# Altium PCB PCB_X_buzzer.PcbDoc
Units mm, origin at the board's own origin, x right, y up, seen from the top; angles counter-clockwise.
Board outline 35.05 x 27.18 mm, 2 copper layers (Top Layer, Bottom Layer); 6 components, 11 nets, 38 pads, 9 vias.
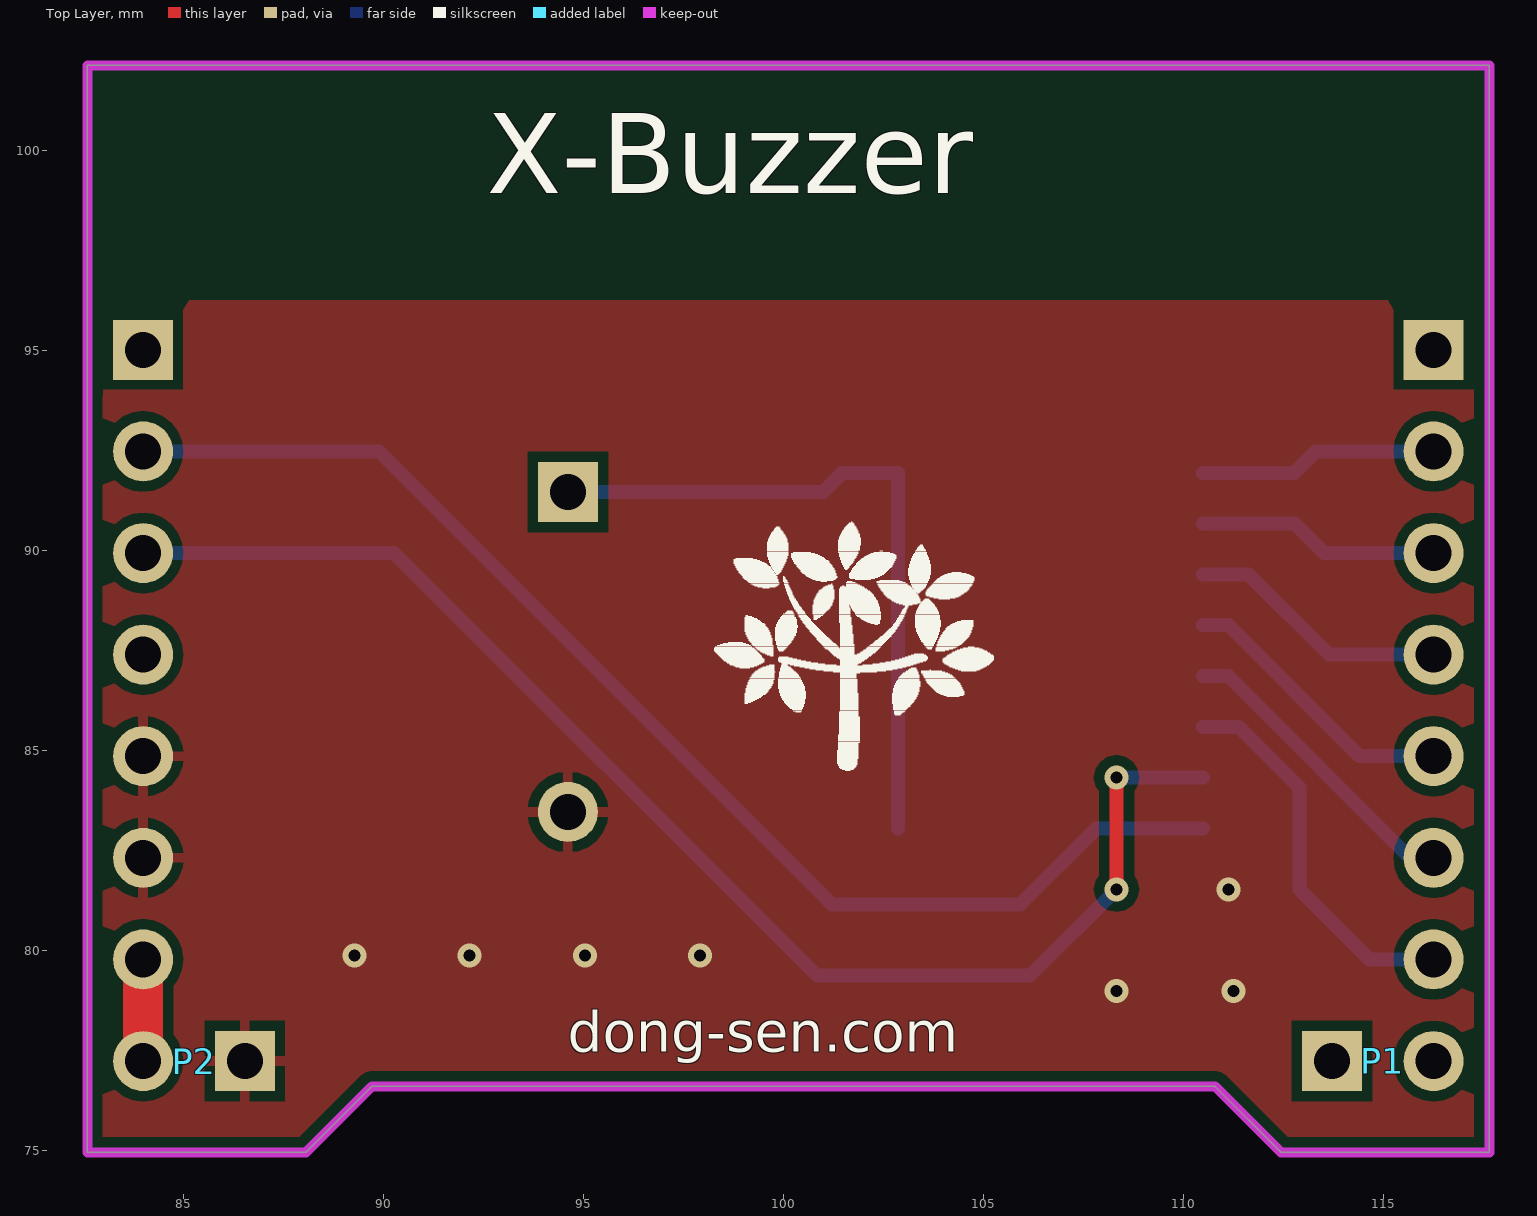
[diagram p0: Top Layer view]
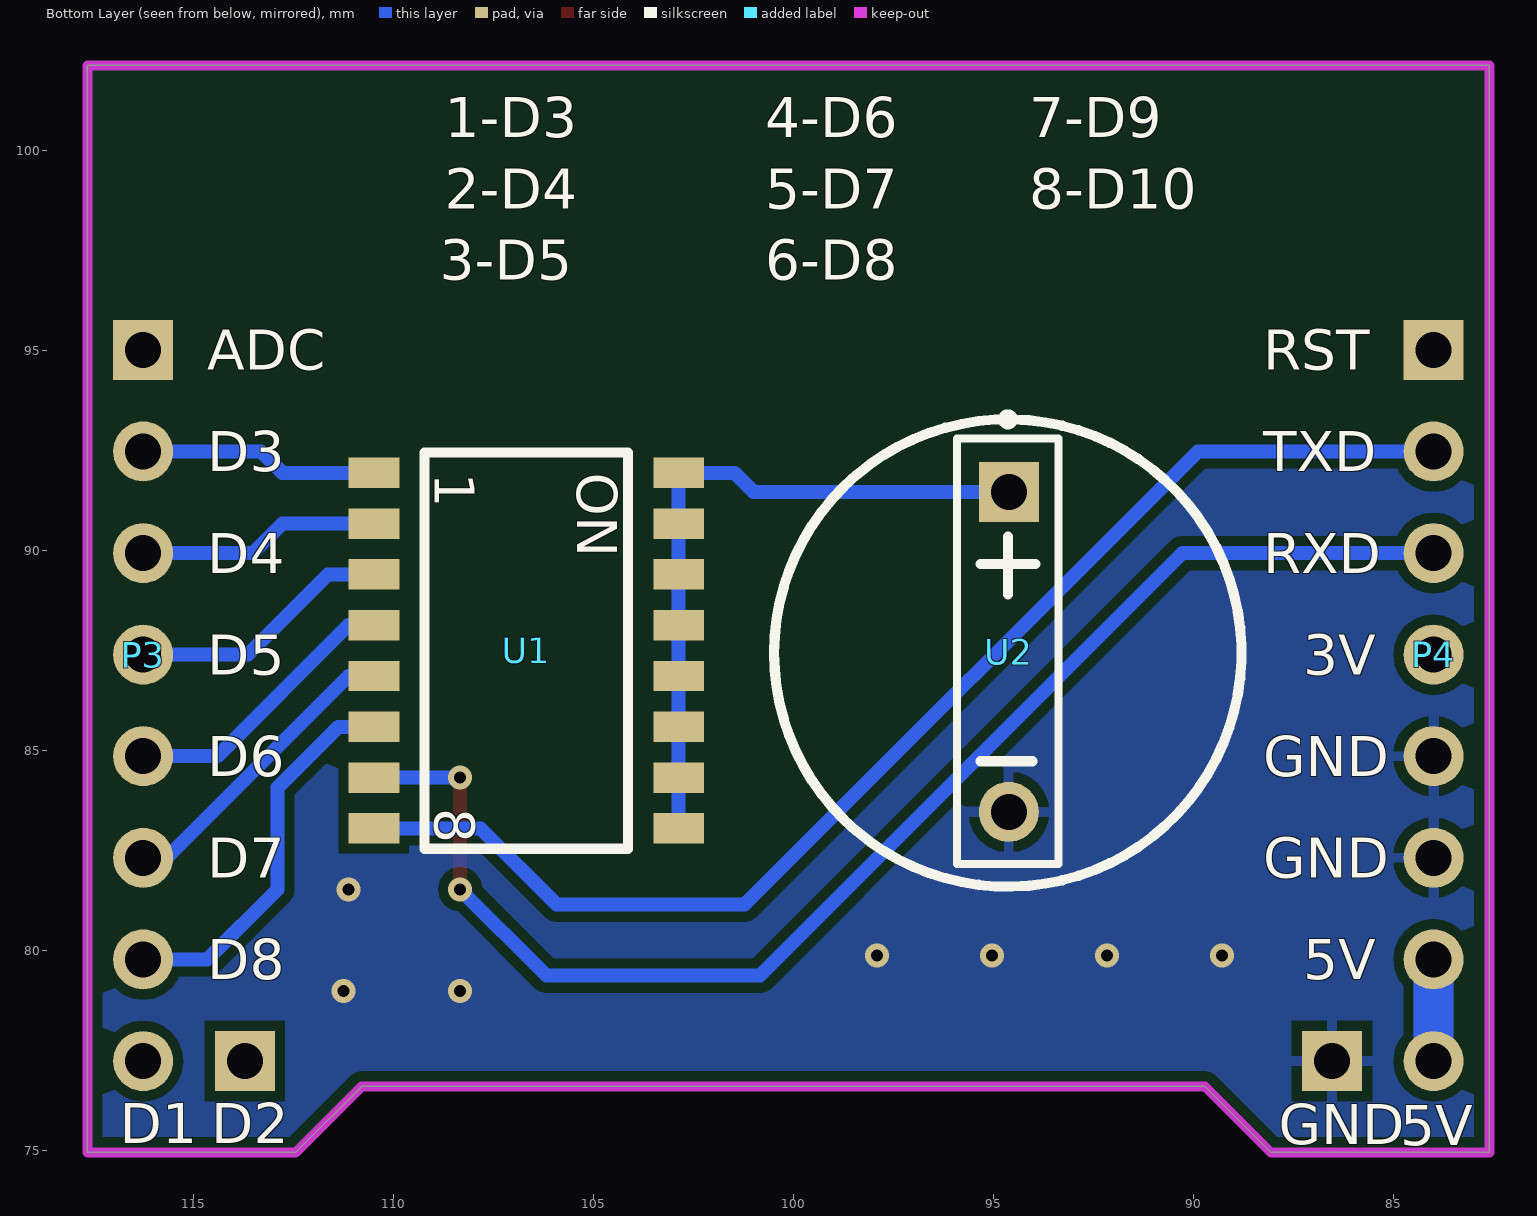
[diagram p1: Bottom Layer view, seen from below]

## Layer stack, top to bottom
Top Solder: solder mask 0.0102, Solder Resist, Dk 3.5
Top Layer: signal copper 0.0356
Dielectric 1: dielectric 0.32, FR-4, Dk 4.8
Bottom Layer: signal copper 0.0356
Bottom Solder: solder mask 0.0102, Solder Resist, Dk 3.5

## Board outline
82.601,74.955 82.601,102.133 117.653,102.133 117.653,74.955 112.446,74.955 110.795,76.606 89.713,76.606 88.062,74.955

## Design rules (kind name [scope] priority, off if disabled: settings)
Clearance [All] p1: gap=0.254
PolygonConnect [All] p1: connectstyle=Relief reliefconductorwidth=0.254 reliefentries=4 polygonreliefangle="90 Angle" airgapwidth=0.254
RoutingVias [All] p1: holewidth=0.711 width=1.27 viastyle="Through Hole" minholewidth=0.711 minwidth=1.27 maxholewidth=0.711 maxwidth=1.27
SolderMaskExpansion [All] p1: expansion=0.102
Width [All] p1: maxlimit=1 minlimit=0.254 preferedwidth=0.254
30 further rules are at their usual default settings.

## Components (designator, comment, footprint, x,y, rotation, side; value= is the part's Value field where it differs from the comment)
P1 "Header 2" HDR1X2 113.716,77.241 r0 top
P2 "Header 2" HDR1X2 86.538,77.241 r180 top
P3 "Header 7" HDR1X7 116.256,95.021 r270 bottom
P4 "Header 7" HDR1X7 83.998,95.021 r270 bottom
U1 "1.27mmSwitch" NumberSwitch 110.49,91.948 r270 bottom
U2 "buzzer" buzzer 94.615,91.468 r0 bottom

## Footprints (in the part's own frame and the unit in brackets; to place one, negate y for a bottom-side part, rotate by r counter-clockwise, add the part's x,y. Pads: shape width x height; smd on the part's side, far side on the other; paste and mask are expansions set on the pad)
buzzer [mm]
  rect 1.5x1.5 hole 0.9: 1(0,0)
  round 1.5 hole 0.9: 2(0,8)
  silkscreen extent -5.81,-1.94 5.87,9.87
HDR1X2 [mm] "Connector; Header; 2 Position"
  rect 1.5x1.5 hole 0.9: 1(0,0)
  round 1.5 hole 0.9: 2(2.54,0)
HDR1X7 [mm] "Connector; Header; 7 Position"
  rect 1.5x1.5 hole 0.9: 1(0,0)
  round 1.5 hole 0.9: 2(2.54,0) 3(5.08,0) 4(7.62,0) 5(10.16,0) 6(12.7,0) 7(15.24,0)
NumberSwitch [mm]
  rect 0.76x1.27 smd: 1(0,0) 2(1.27,0) 3(2.54,0) 4(3.81,0) 5(5.08,0) 6(6.35,0) 7(7.62,0) 8(8.89,0) 9(8.89,7.62) 10(7.62,7.62) 11(6.35,7.62) 12(5.08,7.62) 13(3.81,7.62) 14(2.54,7.62) 15(1.27,7.62) 16(0,7.62)
  silkscreen extent -0.51,1.27 9.4,6.35

## Part data
P1 P2: "Header, 2-Pin"
P3 P4: "Header, 7-Pin"
U1: library part NumberSwitch, "拨码开关"
U2: "3V蜂鸣器"

## Free pads (board coordinates)
  round 3 on Keep-Out: ""(85.141,99.593) ""(115.113,99.593)

## Via types
v1: diameter 0.6, hole 0.3, Top Layer to Bottom Layer, tented both sides, 9 vias

## Nets (pads, with @x,y where several pads share a name; then routed paths per layer and width w, separated by ;. In a path a pad name is that pad's centre, name@x,y a point inside that pad or via, vN(x,y) a via of type N, cw(c..) or ccw(c..) an arc to the next point about the centre after c; other vN are vias at no path point)
D3: P3.2 U1.1 | length 6
  Bottom Layer w0.35: U1.1 112.776,91.948 113.309,92.481 P3.2
D4: P3.3 U1.2 | length 6.1
  Bottom Layer w0.35: U1.2 112.776,90.678 113.513,89.941 P3.3
D5: P3.4 U1.3 | length 6.6
  Bottom Layer w0.35: U1.3 111.633,89.408 113.64,87.401 P3.4
D6: P3.5 U1.4 | length 7.1
  Bottom Layer w0.35: U1.4 111.125,88.138 114.402,84.861 P3.5
D7: P3.6 U1.5 | length 7.6
  Bottom Layer w0.35: U1.5 111.125,86.868 115.672,82.321 P3.6
D8: P3.7 U1.6 | length 9.7
  Bottom Layer w0.35: U1.6 111.379,85.598 112.903,84.074 112.903,81.534 114.656,79.781 P3.7
D9: P4.3 U1.7 | length 34.6
  Top Layer w0.35: v1(108.331,81.534) v1(108.331,84.328)
  Bottom Layer w0.35: P4.3 90.272,89.941 100.838,79.375 106.172,79.375 v1(108.331,81.534) ; v1(108.331,84.328) U1.7
D10: P4.2 U1.8 | length 32
  Bottom Layer w0.35: P4.2 89.891,92.481 101.219,81.153 105.918,81.153 107.823,83.058 U1.8
GND: P2.1 P4.5 P4.6 U2.2
  other v1: 108.331,78.994 111.252,78.994 89.281,79.883 92.16,79.883 95.038,79.883 97.917,79.883 111.125,81.534
NetU1_9: U1.9 U1.10 U1.11 U1.12 U1.13 U1.14 U1.15 U1.16 U2.1 | length 18.6
  Bottom Layer w0.35: U2.1 100.993,91.468 101.473,91.948 U1.16 U1.15 U1.14 U1.13 U1.11 ; U1.9 U1.10 U1.11 ; U1.12 U1.11
VCC_5V: P2.2 P4.7 | length 5.1
  Top Layer w1: P2.2 P4.7
  Bottom Layer w1: P2.2 P4.7
pads on no net: P1.1 P1.2 P3.1 P4.1 P4.4

## Polygon pours and split planes (outlines as drawn)
GND on Top Layer "Bottom_GND" (solid, remove dead copper, pour order 0): 82.601,96.266 117.653,96.266 117.653,74.955 82.601,74.955
GND on Bottom Layer "Bottom_GND" (solid, remove dead copper, pour order 2): 82.601,96.266 117.653,96.266 117.653,74.955 82.601,74.955

## Keep-outs
Keep-Out Layer:
  the board outline again, w0.254

## Silkscreen, mask and mechanical layers (free items; w line width, h text height)
Top Overlay:
  drawing of 1036 lines, arcs and shapes, not listed
  text "X-Buzzer" at 92.583,98.933 h2
  text "dong-sen.com" at 94.615,77.47 h1
Bottom Overlay:
  text "7-D9" at 94.107,100.33 h1
  text "4-D6" at 100.711,100.33 h1
  text "1-D3" at 108.712,100.33 h1
  text "8-D10" at 94.107,98.552 h1
  text "5-D7" at 100.711,98.552 h1
  text "2-D4" at 108.712,98.552 h1
  text "6-D8" at 100.711,96.774 h1
  text "3-D5" at 108.839,96.774 h1
  text "RST" at 88.252,94.522 h1
  text "ADC" at 114.656,94.522 h1
  text "TXD" at 88.252,91.982 h1
  text "D3" at 114.656,91.982 h1
  text "RXD" at 88.252,89.442 h1
  text "D4" at 114.656,89.442 h1
  text "3V" at 87.252,86.902 h1
  text "D5" at 114.656,86.902 h1
  text "GND" at 88.252,84.362 h1
  text "D6" at 114.656,84.362 h1
  text "GND" at 88.252,81.822 h1
  text "D7" at 114.656,81.822 h1
  text "5V" at 87.252,79.282 h1
  text "D8" at 114.656,79.282 h1
  text "D2" at 114.554,75.184 h1
  text "D1" at 116.84,75.184 h1
  text "GND" at 87.871,75.167 h1
  text "5V" at 84.831,75.141 h1

## Text inside footprints (layer, text, board x,y; h text height)
U1: Bottom Overlay "ON" at 105.41,91.948 h1 r90; Bottom Overlay "1" at 108.966,91.948 h1 r90; Bottom Overlay "8" at 108.966,83.566 h1 r90